# Altium PCB pyESP32.PcbDoc
Units mil, origin at the board's own origin, x right, y up, seen from the top; angles counter-clockwise.
Board outline 2140.63 x 1110 mil, 2 copper layers (Top Layer, Bottom Layer); 50 components, 49 nets, 214 pads, 57 vias.
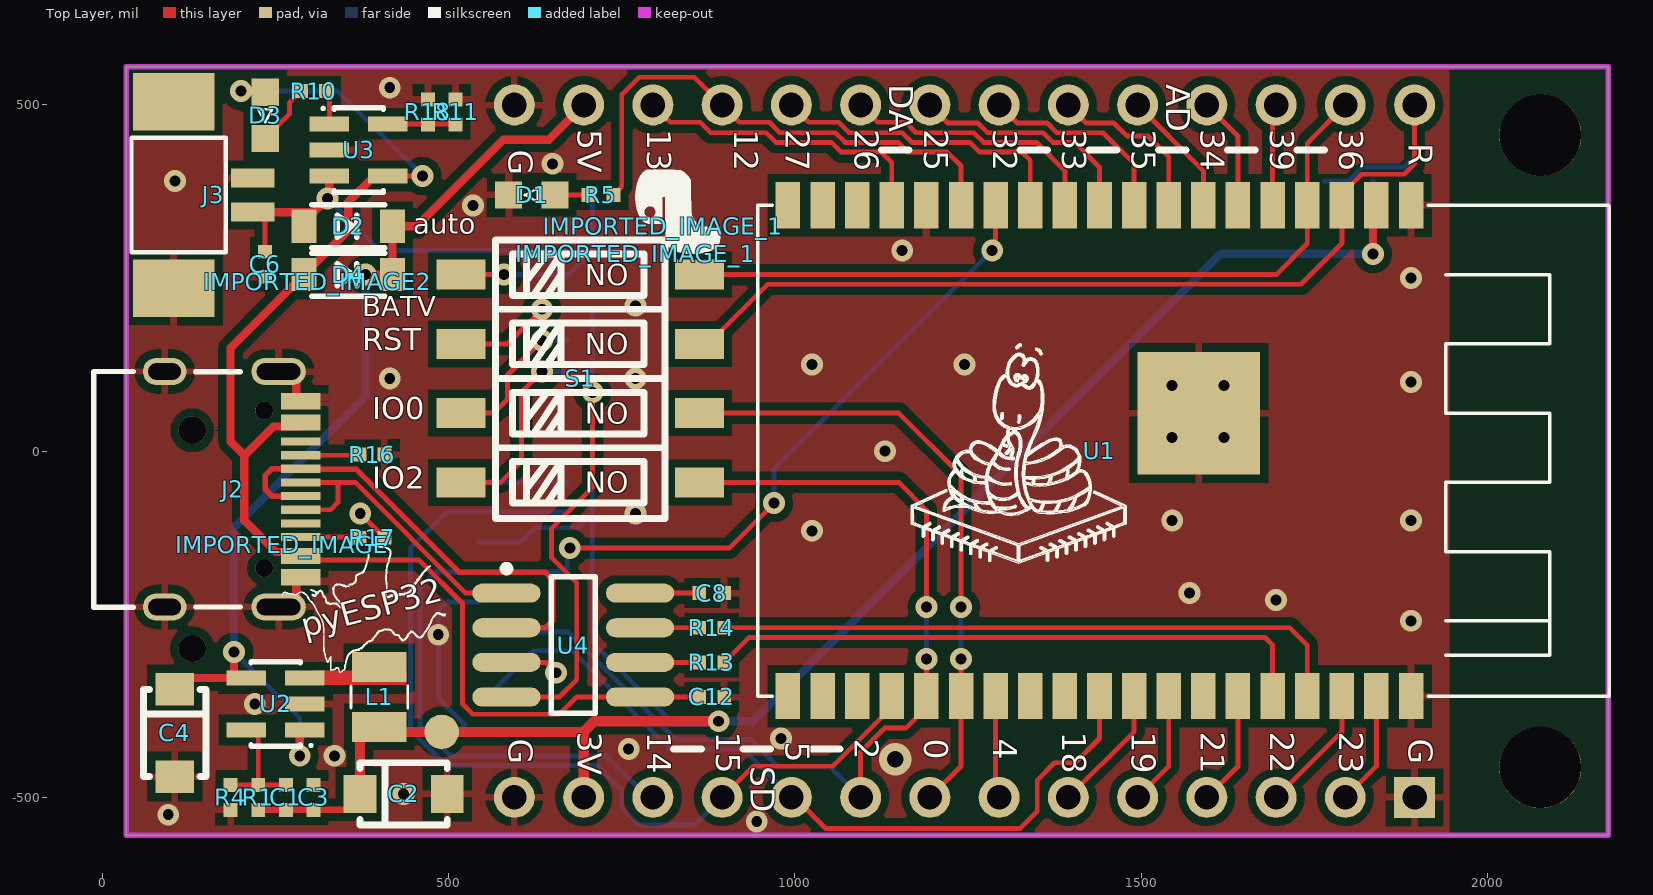
[diagram p0: Top Layer view]
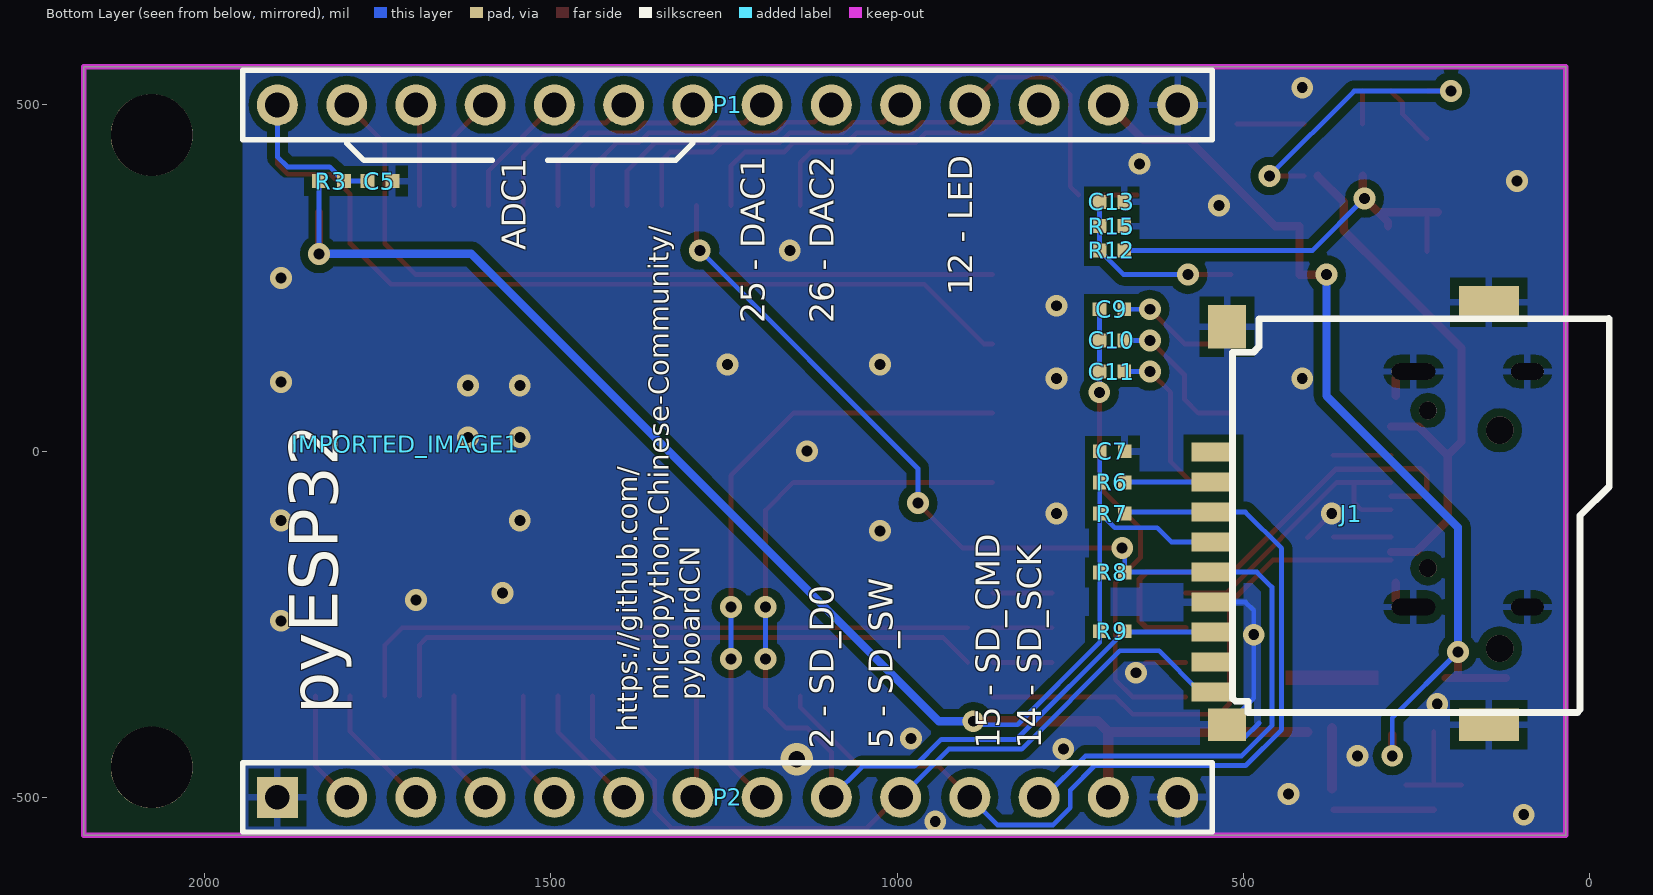
[diagram p1: Bottom Layer view, seen from below]

## Layer stack, top to bottom
Top Layer: signal copper 1.4
Dielectric: dielectric 12.6, FR-4, Dk 4.8
Bottom Layer: signal copper 1.4

## Board outline
34.37,-555 2175,-555 2175,555 34.37,555

## Design rules (kind name [scope] priority, off if disabled: settings)
Clearance Clearance_2 [(OnLayer('Keep-Out Layer'))] p1: gap=0
Clearance Clearance_1 [InPolygon] p2: gap=12
Clearance [All] p3: gap=7
ComponentClearance [All] p1 off: gap=10 collisioncheckmode=3 verticalgap=10 showdistances=FALSE
Height [All] p1 off: minheight=0 maxheight=1000 prefheight=500
PolygonConnect PolygonConnect_1 [IsVia] p1: connectstyle=Direct reliefconductorwidth=10 reliefentries=4 polygonreliefangle="90 Angle"
PolygonConnect [All] p2: connectstyle=Relief reliefconductorwidth=10 reliefentries=4 polygonreliefangle="90 Angle"
RoutingVias [All] p1: holewidth=28 width=50 viastyle="Through Hole" minholewidth=11.81 minwidth=23.62 maxholewidth=15.75 maxwidth=31.5
SilkscreenOverComponentPads [All] p1: minsilkscreentomaskgap=10
SolderMaskExpansion [All] p1: expansion=4
Width [All] p1: maxlimit=20 minlimit=7 preferedwidth=7
25 further rules are at their usual default settings.

## Classes and differential pairs
component class pyESP32: C1 C2 C3 C4 C5 C6 C7 C8 C9 C10 C11 C12 C13 D1 D2 D3 D4 J1 J2 J3 L1 P1 P2 R1 R3 R4 R5 R6 R7 R8 R9 R10 R11 R12 R13 R14 R15 R16 R17 R18 S1 U1 U2 U3 U4

## Components (designator, comment, footprint, x,y, rotation, side; value= is the part's Value field where it differs from the comment)
C1 "22p" C0402 265,-500 r270 top
C2 "47uF" 3216 435,-495 r0 top
C3 "100n" C0402 305,-500 r270 top
C4 "47uF" 3216 104.37,-407 r270 top
C5 "100n" C0402 1747,390 r0 bottom
C6 "2.2u" C0402 235,270 r90 top
C7 "2.2u" C0402 689.37,0 r0 bottom
C8 "100n" C0402 880,-205 r180 top
C9 "2.2u" C0402 690,205 r0 bottom
C10 "4.7u" C0402 690,160 r0 bottom
C11 "4.7u" C0402 690,115 r0 bottom
C12 "100n" C0402 880,-355 r0 top
C13 "100n" C0402 690,360 r0 bottom
D1 "LED GREEN" LED_0603_GREEN 620,370 r90 top
D2 "SS14" SOD-123 355,325 r180 top (schematic designator D4)
D3 "LED RED" LED_0603_RED 235,485 r180 top
D4 "SS14" SOD-123 355,255 r180 top
IMPORTED_IMAGE "Comment" IMPORTED_IMAGE 260,-135 r0 top
IMPORTED_IMAGE1 "Comment" IMPORTED_IMAGE 1710,10 r180 bottom (schematic designator IMPORTED_IMAGE)
IMPORTED_IMAGE2 "Comment" IMPORTED_IMAGE 311,245 r315 top (schematic designator IMPORTED_IMAGE)
IMPORTED_IMAGE_1 "Comment" IMPORTED_IMAGE 770,285 r90 top (schematic designator IMPORTED_IMAGE)
IMPORTED_IMAGE_1 "Comment" IMPORTED_IMAGE 810,325 r90 top (schematic designator IMPORTED_IMAGE)
J1 "microSD PUSH-PULL" microSD-1 344.37,-90 r180 bottom
J2 "Type C 16p" "Type-C 16P" 254.37,-55 r270 top
J3 "Bat" 2P-1.25 160,370 r90 top
L1 "2.2uH" IND-252012 400,-355 r90 top
P1 "Header 14" HDR1X14#1 1895,500 r180 bottom
P2 "Header 14" HDR1X14#2 1895,-500 r180 bottom
R1 "91K" SMD0402 225,-500 r270 top
R3 "10K" SMD0402 1817,390 r0 bottom
R4 "20K" SMD0402 185,-500 r90 top
R5 "2K" SMD0402 720,370 r0 top
R6 "10K" SMD0402 689.37,-45 r180 bottom
R7 "10K" SMD0402 689.37,-90 r180 bottom
R8 "10K" SMD0402 689.37,-175 r180 bottom
R9 "10K" SMD0402 689.37,-260 r180 bottom
R10 "2K" SMD0402 305,520 r180 top
R11 "10K" SMD0402 510,490 r270 top
R12 "330K" SMD0402 690,290 r180 bottom
R13 "470" SMD0402 880,-305 r0 top
R14 "470" SMD0402 880,-255 r0 top
R15 "91K" SMD0402 690,325 r0 bottom
R16 "5.1k" SMD0402 389.37,-5 r0 top
R17 "5.1k" SMD0402 389.37,-125 r0 top
R18 "NC" SMD0402 470,490 r270 top (schematic designator R14)
S1 "SW DIP-4" SW-SMD4 690,105 r270 top
U1 "ESP32-WROVER" ESP32-WROVER 940,355 r270 top
U2 "HX3406" SOT23-5 250,-365 r90 top
U3 "TP4054" SOT23-5 370,435 r270 top
U4 "CH330N" NSO8_M 680,-280 r0 top

## Footprints (in the part's own frame and the unit in brackets; to place one, negate y for a bottom-side part, rotate by r counter-clockwise, add the part's x,y. Pads: shape width x height; smd on the part's side, far side on the other; paste and mask are expansions set on the pad)
2P-1.25 [mm]
  rect 0.7x1.6 smd: 1(-0.625,-1.45) 2(0.625,-1.45)
  rect 2.1x3 smd: ""(-3.425,1.45) ""(3.425,1.45)
  silkscreen extent -2.1,-0.46 2.1,3, body extent -3.5,-2.22 3.5,3.37, height 3.9
3216 [mm]
  rect 1.2x1.4 smd: 1(-1.6,0) 2(1.6,0)
  silkscreen extent -1.6,-1.14 1.6,1.14, body extent -1.7,-0.9 1.7,0.9, height 1.8
C0402 [mil]
  rect 20x20 smd: 1(-18,0) 2(18,0)
  body extent -20,-10 20,10, height 14
ESP32-WROVER [mil] "ESP32-WROVER"
  rect 66.93x35.43 smd: 1(0,950) 2(0,900) 3(0,850) 4(0,800) 5(0,750) 6(0,700) 7(0,650) 8(0,600) 9(0,550) 10(0,500) 11(0,450) 12(0,400) 13(0,350) 14(0,300) 15(0,250) 16(0,200) 17(0,150) 18(0,100) 19(0,50) 20(708.66,50) 21(708.66,100) 22(708.66,150) 23(708.66,200) 24(708.66,250) 25(708.66,300) 26(708.66,350) 27(708.66,400) 28(708.66,450) 29(708.66,500) 30(708.66,550) 31(708.66,600) 32(708.66,650) 33(708.66,700) 34(708.66,750) 35(708.66,800) 36(708.66,850) 37(708.66,900) 38(708.66,950)
  rect 177.17x177.17 smd: 39(300,643.31)
  silkscreen extent 0,7 709,1236, body extent 0,5 710,1235, height 138
HDR1X14#1 [mm] "Connector; Header; 14 Position"
  round 1.5 hole 0.9: 1(0,0) 2(2.54,0) 3(5.08,0) 4(7.62,0) 5(10.16,0) 6(12.7,0) 7(15.24,0) 8(17.78,0) 9(20.32,0) 10(22.86,0) 11(25.4,0) 12(27.94,0) 13(30.48,0) 14(33.02,0)
  silkscreen extent -1.27,-1.27 34.29,1.27
HDR1X14#2 [mm] "Connector; Header; 14 Position"
  rect 1.5x1.5 hole 0.9: 1(0,0)
  round 1.5 hole 0.9: 2(2.54,0) 3(5.08,0) 4(7.62,0) 5(10.16,0) 6(12.7,0) 7(15.24,0) 8(17.78,0) 9(20.32,0) 10(22.86,0) 11(25.4,0) 12(27.94,0) 13(30.48,0) 14(33.02,0)
  silkscreen extent -1.27,-1.27 34.29,1.27
IMPORTED_IMAGE [mil]
  silkscreen extent 0,-185 236,0
IND-252012 [mm]
  rect 1.1x2 smd: 1(1.092,0) 2(-1.092,0)
  silkscreen extent -0.4,-1.04 0.4,1.04, body extent -1.3,-1 1.3,1, height 1.2
LED_0603_GREEN [mm]
  rect 1x1 smd paste+0 mask+0: 1(0,-0.85) 2(0,0.85)
  silkscreen extent -0.25,-0.23 0.25,0.25, body extent -0.38,-0.76 0.38,0.76, height 0.8
LED_0603_RED [mm]
  rect 1x1 smd paste+0 mask+0: 1(0,-0.85) 2(0,0.85)
  silkscreen extent -0.25,-0.23 0.25,0.25, body extent -0.38,-0.76 0.38,0.76, height 0.8
microSD-1 [mm]
  rect 1.6x0.7 smd: 1(-5.05,2.25) 2(-5.05,1.15) 3(-5.05,0.05) 4(-5.05,-1.05) 5(-5.05,-2.15) 6(-5.05,-3.25) 7(-5.05,-4.35) 8(-5.05,-5.45) 9(-5.05,-6.55)
  rect 1.4x1.2 smd: GP1(-4.55,-7.75)
  rect 2.2x1.2 smd: GP2(5.05,-7.75) GP3(5.05,7.75)
  rect 1.4x1.6 smd: GP4(-4.55,6.85)
  silkscreen extent -4.35,-7.29 9.47,7.15, body extent -5.85,-8 9.4,8, height 1.85
NSO8_M [mm]
  oval 2.5x0.7 smd: 1(-2.45,1.905) 2(-2.45,0.635) 3(-2.45,-0.635) 4(-2.45,-1.905) 5(2.45,-1.905) 6(2.45,-0.635) 7(2.45,0.635) 8(2.45,1.905)
  silkscreen extent -2.57,-2.5 0.8,2.93, body extent -2.87,-2.46 2.91,2.44, height 1.45
SMD0402 [mil]
  rect 20x20 smd: 1(-18,0) 2(18,0)
  body extent -20,-10 20,10, height 14
SOD-123 [mil]
  rect 35.8x48 smd: 1(64,0) 2(-64,0)
  silkscreen extent -53,-31 53,31, body extent -73,-32 73,31, height 50
SOT23-5 [mm] "SOT-23/SC-74A; 5 Leads; Body 3 x 3 mm, inc. leads (LxW max)"
  rect 0.55x1.45 smd: 1(-0.95,-1.075) 2(0,-1.075) 3(0.95,-1.075) 4(0.95,1.075) 5(-0.95,1.075)
  silkscreen extent -1.57,-1.35 1.55,0.9, body extent -1.5,-1.25 1.5,1.25, height 1.05
SW-SMD4 [mm]
  rect 1.1x1.8 smd: 1(-3.81,-4.375) 2(-1.27,-4.375) 3(1.27,-4.375) 4(3.81,-4.375) 5(3.81,4.375) 6(1.27,4.375) 7(-1.27,4.375) 8(-3.81,4.375)
  silkscreen extent -5.08,-3.1 5.13,3.11, body extent -5.81,-4.95 5.82,4.95, height 4.05
"Type-C 16P" [mm]
  rect 0.3x1.45 smd: A1(-3.375,0.82) A4(-2.6,0.82) A5(-1.25,0.82) A6(-0.25,0.82) A7(0.25,0.82) A8(1.25,0.82) A9(2.6,0.82) A12(3.375,0.82) B1(3.075,0.82) B4(2.3,0.82) B5(1.75,0.82) B6(0.75,0.82) B7(-0.75,0.82) B8(-1.75,0.82) B9(-2.3,0.82) B12(-3.075,0.82)
  oval 1x2 smd: E1(-4.32,0) E4(4.32,0)
  oval 0.6x1.6 hole 0.6 slot 1.6 at 90 deg: E1(-4.32,0) E4(4.32,0)
  oval 1x1.6 smd: E2(-4.32,-4.18) E3(4.32,-4.18)
  oval 0.6x1.2 hole 0.6 slot 1.2 at 90 deg: E2(-4.32,-4.18) E3(4.32,-4.18)
  round 0.65 hole 0.65 unplated: ""(-2.89,-0.53) ""(2.89,-0.53)
  silkscreen extent -4.32,-6.78 4.32,-1.4, body extent -4.48,-6.83 4.48,0.92, height 3.26

## Part data
C1 C3 C5 C6 C7 C8 C9 C10 C11 C12 C13: library part Cap
C2 C4: library part E
D1: library part LED-GREEN, "Green LED"
D2 D4: library part Diode
D3: library part LED-RED, "RED LED"
J3: library part "Header 2", "Header, 2-Pin"
L1: library part Inductor
P1 P2: "Header, 14-Pin"
R1 R3 R4 R5 R6 R7 R8 R9 R10 R11 R12 R13 R14 R15 R16 R17 R18: library part Res
S1: "DIP Switch, 4 Position, SPST"
U2: library part SY8089

## Free pads (board coordinates)
  round 50 on Top Solder: 0(380,-200)
  round 50 smd: 0(490,-405.5)
  round 39.37 on Top Solder: 0(935,155) 0(1845,450)
  round 39.37 on Bottom Solder: 0(1145,-535) 0(1200,-435)
  round 118.11 hole 118.11 unplated: ""(2076.57,-456.57) ""(2076.57,456.57)

## Via types
v1: diameter 31.5, hole 15.75, Top Layer to Bottom Layer, 54 vias
v2: diameter 39.37, hole 39.37, Top Layer to Bottom Layer, 2 vias
v3: diameter 47.24, hole 23.62, Top Layer to Bottom Layer, 1 vias

## Nets (pads, with @x,y where several pads share a name; then routed paths per layer and width w, separated by ;. In a path a pad name is that pad's centre, name@x,y a point inside that pad or via, vN(x,y) a via of type N, cw(c..) or ccw(c..) an arc to the next point about the centre after c; other vN are vias at no path point)
3V3: C1.2 C2.1 C3.2 C7.2 J1.4 L1.2 P2.13 pad.0@490,-405.5 R1.2 R3.2 R6.1 R7.1 R8.1 R9.1 U1.2 | length 2894.4
  Top Layer w9: R1.2 C2.1@370,-518
  Top Layer w12: v1(1835,285) U1.2@1835,345
  Top Layer w15: C2.1@372,-487 L1.2@372,-400 ; L1.2@407.5,-405.5 695,-405.5 ; P2.13@695,-495 695,-405.5 ; v1@890,-385 v1(890,-390) 710.5,-390 695,-405.5
  Bottom Layer w7: J1.4 603.66,-131.34 624.5,-110.5 685.72,-110.5 706.22,-90 R7.1 ; C7.2 R7.1 ; v1@890,-395 826.17,-395 707.37,-276.2 R9.1 R7.1 ; v1(1835,285) R3.2
  Bottom Layer w12: v1(890,-390) 940,-390 1615,285 v1(1835,285)
5V: C4.1 D2.2 D4.2 P1.13 U2.1 U2.4 | length 1425.3
  Top Layer w12: C4.1@120.78,-327.6 U2.4@190,-327.6 ; v1(190,-290) U2.4@190,-327.6 ; U2.4 U2.4@190,-327.6 ; v1(285,-440) U2.1@285,-409.72 ; v1(380,255) D4.2 D2.2 454,325 579,450 645,450 P1.13
  Bottom Layer w7: v1(190,-290) 285,-385 v1(285,-440)
  Bottom Layer w12: v1(190,-290) 190,-110 380,80 v1(380,255)
BAT: C6.2 D2.1 J3.1 R12.2 U3.3 | length 603.5
  Top Layer w7: C6.2 J3.1@235,340
  Top Layer w12: J3.1@219.37,345 D2.1@305,345 ; D2.1 291,331 D2.1@305,345 ; U3.3 327.68,367.68 v1(325,365) D2.1@305,345
  Bottom Layer w7: v1(325,365) 400,290 R12.2
DM: J2.A7 J2.B7 U4.2 | length 691.4
  Top Layer w8: J2.A7 244.84,-64.84 235,-55 235,-35 244.53,-25.47 J2.B7 287.18,-26 366.51,-26 515.51,-175 640,-175 650,-185 650,-245 640,-255 U4.2
DP: J2.A6 J2.B6 U4.1 | length 449.7
  Top Layer w7: J2.B6 329.53,-84.53 340,-74.06 340,-45.16 ; J2.A6 340,-45.16 ; U4.1 525,-205 365.16,-45.16 340,-45.16
FB: C1.1 R1.1 R4.2 U2.5 | length 157
  Top Layer w7: R4.2 R1.1 ; U2.5@225,-405 R1.1 ; C1.1 R1.1
GND: C2.2 C3.1 C4.2 C5.1 C6.1 C7.1 C8.1 C12.2 C13.1 D1.2 J1.6 J1.GP1 J1.GP2 J1.GP3 J1.GP4 J2.A1 J2.A12 J2.B1 J2.B12 J2.E1 J2.E2 J2.E3 J2.E4 J3.2 J3.@102.91,235.16 P1.14 P2.1 P2.14 R4.1 R11.1 R15.1 R16.2 R17.2 R18.1 U1.1 U1.15 U1.38 U1.39 U2.2 U3.2 U4.3 | length 484.1
  Top Layer w7: v1(372.37,-90) R17.2 ; U4.3 640,-305 v1(655,-320)
  Top Layer w12: J2.E4@280,-215 J2.A12@280,-190 ; J2.A1@280,80 J2.E1@280,105
  Bottom Layer w7: 477.41,-392.71 498.63,-413.92 504.7,-413.92 J1.GP1 485,-356.61 485,-230 497.05,-217.95 J1.6
  other v1: 945,-535 95,-525 435,-495 335,-440 760,-430 980,-415 220,-365 485,-265 1890,-245 1695,-215 1570,-205 1025,-115 1545,-100 1890,-100 770,-90 1130,0 1545,20 1620,20 1545,95 1620,95 1890,100 415,105 770,105 1025,125 1245,125 770,210 1890,250 1155,290 535,355 105,390 650,415 415,525
  other v3: 1145,-445
IO0: P2.8 S1.6 U1.25 | length 898.7
  Top Layer w7: S1.6 1150,55 1240,-35 v1(1240,-225) ; P2.8 1240,-455 U1.25 v1(1240,-300)
  Bottom Layer w7: v1(1240,-300) v1(1240,-225)
IO2: J1.7 P2.9 R9.2 S1.5 U1.24 | length 1466.5
  Top Layer w7: S1.5 1150,-45 1190,-85 v1(1190,-225) ; P2.9 1095,-434.49 1129.49,-400 1160,-400 1190,-370 U1.24 v1(1190,-300)
  Bottom Layer w7: J1.7 R9.2@670.11,-261.26 ; R9.2 827.62,-416.25 936.25,-416.25 975,-455 978.39,-455 ; 978.42,-454.97 1049.97,-454.97 P2.9 ; v1(1190,-300) v1(1190,-225)
IO4: P2.7 U1.26 | length 148.4
  Top Layer w7: U1.26 1290,-495 P2.7
IO5: J1.9 P2.10 U1.29 | length 1152.5
  Top Layer w7: P2.10@995,-495 1045,-545 1325,-545 1350,-520 1350,-475 1375,-450 1405,-450 1440,-415 U1.29
  Bottom Layer w7: J1.9@562.13,-347.87 621.71,-288.29 678.29,-288.29 820.25,-430.25 925.25,-430.25 P2.10
IO12: P1.11 R5.2 U1.14 | length 760.4
  Top Layer w7: R5.2 750,382 750,515 775.03,540.03 854.97,540.03 P1.11 920,475 963.39,475 978.42,459.97 1058.62,459.97 1072.62,445.97 1149.43,445.97 1163.43,431.97 1220,431.97 1240,411.97 U1.14
IO13: P1.12 U1.16 | length 441.4
  Top Layer w7: P1.12 820,475 863.39,475 878.42,459.97 958.62,459.97 972.62,445.97 1052.82,445.97 1066.82,431.97 1125,431.97 1140,416.97 U1.16
IO14: J1.5 P2.12 R8.2 U1.13 | length 1704.3
  Top Layer w7: v1(675,-140) 905,-140 v1(970,-75) ; v1@1290,295 U1.13
  Bottom Layer w7: R8.2@671.02,-174.65 J1.5 480.35,-174.65 458.75,-196.25 458.75,-396.4 502.36,-440 727.88,-440 787.88,-500 P2.12 ; R8.2 v1@671.37,-148.63 ; v1(970,-75) 970,-25 v1(1285,290)
IO15: J1.3 P2.11 R7.2 U1.23 | length 1362.1
  Top Layer w7: P2.11 940.03,-454.97 1054.72,-454.97 1140,-369.69 U1.23
  Bottom Layer w7: R7.2@669.4,-88.03 J1.3 496.97,-88.03 444.75,-140.25 444.75,-402.19 496.56,-454 714.54,-454 750,-489.46 750,-515 775.03,-540.03 844.97,-540.03 ; 845,-540 855,-540 P2.11
IO18: P2.6 U1.30 | length 185.7
  Top Layer w7: P2.6 1490,-405 U1.30
IO19: P2.5 U1.31 | length 165
  Top Layer w7: P2.5 1540,-455 U1.31
IO21: P2.4 U1.33 | length 165
  Top Layer w7: P2.4 1640,-455 U1.33
IO22: P2.3 U1.36 | length 185.7
  Top Layer w7: P2.3 1790,-405 U1.36
IO23: P2.2 U1.37 | length 165
  Top Layer w7: P2.2 1840,-455 U1.37
IO25: P1.8 U1.10 | length 337.3
  Top Layer w7: P1.8 1221.03,473.97 1264.42,473.97 1278.42,459.97 1358.62,459.97 1372.62,445.97 1404.03,445.97 1440,410 U1.10
IO26: P1.9 U1.11 | length 384.4
  Top Layer w7: P1.9 1120,475 1160,475 1175.03,459.97 1258.62,459.97 1272.62,445.97 1349.03,445.97 1390,405 U1.11
IO27: P1.10 U1.12 | length 443.1
  Top Layer w7: P1.10 1020,475 1063.39,475 1078.42,459.97 1155.23,459.97 1169.23,445.97 1252.82,445.97 1266.82,431.97 1328.03,431.97 1340,420 U1.12
IO32: P1.7 U1.9 | length 290.2
  Top Layer w7: P1.7 1321.03,473.97 1364.42,473.97 1378.42,459.97 1445.03,459.97 1490,415 U1.9
IO33: P1.6 U1.8 | length 246.1
  Top Layer w7: P1.6 1421.03,473.97 1460.83,473.97 1479.8,455 1510,455 1540,425 U1.8
IO34: P1.4 U1.6 | length 163.6
  Top Layer w7: P1.4 1640,455 U1.6
IO35: P1.5 U1.7 | length 184.4
  Top Layer w7: P1.5 1590,405 U1.7
IO36: P1.2 S1.8 U1.4 | length 1119.2
  Top Layer w7: S1.8 1695,255 1740,300 U1.4 1740,445 P1.2
IO39: P1.3 U1.5 | length 140
  Top Layer w7: U1.5 P1.3@1690,495
NetC8_2: C8.2 U4.8 | length 85.5
  Top Layer w7: U4.8 C8.2
NetC9_1: C9.1 S1.2 | length 175
  Top Layer w7: S1.2 585,155 v1(635,205)
  Bottom Layer w7: v1(635,205) C9.1
NetC10_1: C10.1 S1.3 | length 218.2
  Top Layer w7: S1.3 565,55 585,75 585,110 v1(635,160)
  Bottom Layer w7: v1(635,160) C10.1
NetC11_1: C11.1 S1.4 | length 279.1
  Top Layer w7: S1.4 575,-45 605,-15 605,85 v1(635,115)
  Bottom Layer w7: v1(635,115) C11.1
NetC13_2: C13.2 R12.1 R15.2 S1.1 | length 274.7
  Top Layer w7: S1.1 v1(580,255)
  Bottom Layer w7: v1(580,255) 673,255 R12.1 C13.2
NetD1_1: D1.1 R5.1 | length 48.5
  Top Layer w7: D1.1 R5.1
NetD3_2: D3.2 R10.2 | length 90
  Top Layer w7: D3.2 270,486.53 270,503 R10.2
NetJ2_A5: J2.A5 R16.1 | length 83.9
  Top Layer w7: J2.A5 R16.1@370.58,-5.79
NetJ2_B5: J2.B5 R17.1 | length 83.6
  Top Layer w7: J2.B5 R17.1@370.27,-123.9
NetL1_1: L1.1 U2.3
NetR10_1: R10.1 U3.1 | length 47.9
  Top Layer w7: U3.1 R10.1@327.68,520.32
NetR11_2: R11.2 R18.2 U3.5 | length 97.3
  Top Layer w7: U3.5 R11.2@509.6,472.4
NetR13_1: R13.1 U4.6 | length 85.5
  Top Layer w7: U4.6 R13.1
NetR14_1: R14.1 U4.7 | length 85.5
  Top Layer w7: U4.7 R14.1
RST: C5.2 P1.1 R3.1 S1.7 U1.3 | length 1486.6
  Top Layer w7: S1.7 875,155 961,241 1731,241 1790,300 U1.3 1790,371.03 1818.97,400 1880,400 1895,415 P1.1
  Bottom Layer w7: C5.2 R3.1 1819.5,410.5 1880.5,410.5 1895,425 P1.1
SD_DAT3: J1.2 R6.2 | length 127.9
  Bottom Layer w7: J1.2 R6.2@671.09,-44.72
U_RTS: C9.2 C10.2 C11.2 U4.4 | length 686.4
  Top Layer w7: U4.4 660,-355 685,-330 685,-190 648.75,-153.75 648.75,-111.25 708,-52 v1(708,85)
  Bottom Layer w7: v1(708,85) C9.2
U_RX: R14.2 U1.35 | length 926
  Top Layer w7: R14.2 1715,-255 1740,-280 U1.35
U_TX: R13.2 U1.34 | length 885.1
  Top Layer w7: R13.2 934,-269 1679,-269 1690,-280 U1.34
VBUS: C12.1 D3.1 D4.1 J2.A4 J2.A9 J2.B4 J2.B9 U3.4 U4.5 | length 1950.8
  Top Layer w7: v1(200,520) D3.1@233.46,520 ; J2.A9 457.36,-157.36 520,-220 520,-365 535,-380 660,-380 685,-355 U4.5 C12.1 ; U3.4 v1(462.4,397.6)
  Top Layer w12: J2.B4 250.55,-145.55 205,-100 205,-6.2 ; J2.B9 246.76,35.55 205,-6.2 ; U3.4@392.6,397.6 355,360 355,319 D4.1 185,149 185,13.8 205,-6.2
  Bottom Layer w7: v1(200,520) 340,520 v1(462.4,397.6)
pads on no net: J1.1 J1.8 J2. J2.A8 J2.B8 J3.@102.91,504.84 U1.17 U1.18 U1.19 U1.20 U1.21 U1.22 U1.27 U1.28 U1.32
copper on no net:
  other v2: 129.8,-284.88 129.8,30.08

## Polygon pours and split planes (outlines as drawn)
GND on Bottom Layer "Top Layer-No Net" (solid, remove dead copper, pour order 6): 1945,-555 1945,555 34.37,555 34.37,-555
GND on Top Layer "Top Layer-No Net" (solid, remove dead copper, pour order 8): 34.37,555 34.37,-555 1945,-555 1945,555

## Keep-outs
Keep-Out Layer:
  the board outline again, w7.87

## Other copper
Top Layer:
  rectangle net NetL1_1: 305,-338 439,-317
  pour cut-out: 1945,555 2175,555 2175,-555 1945,-555

## Silkscreen, mask and mechanical layers (free items; w line width, h text height)
Top Overlay:
  drawing of 617 lines, arcs and shapes, not listed
  text "DA" at 1125,530 h60 r270
  text "AD" at 1525,530 h60 r270
  text "5V" at 675,465 h60 r270
  text "13" at 775,465 h60 r270
  text "12" at 901,465 h60 r270
  text "27" at 975,465 h60 r270
  text "26" at 1075,465 h60 r270
  text "25" at 1175,465 h60 r270
  text "32" at 1275,465 h60 r270
  text "33" at 1375,465 h60 r270
  text "35" at 1475,465 h60 r270
  text "34" at 1575,465 h60 r270
  text "39" at 1675,465 h60 r270
  text "36" at 1775,465 h60 r270
  text "R" at 1875,445 h60 r270
  text "G" at 575,435 h60 r270
  text "auto" at 448.9,303.99 h50
  text "BATV" at 375,185 h50
  text "RST" at 375,135 h55
  text "IO0" at 390,35 h55
  text "IO2" at 390,-65 h55
  text "pyESP32" at 295,-280 h60 r15
  text "3V" at 675,-405 h60 r270
  text "14" at 775,-405 h60 r270
  text "15" at 875,-405 h60 r270
  text "18" at 1375,-405 h60 r270
  text "19" at 1475,-405 h60 r270
  text "21" at 1575,-405 h60 r270
  text "22" at 1675,-405 h60 r270
  text "23" at 1775,-405 h60 r270
  text "G" at 575,-415 h60 r270
  text "2" at 1075,-415 h60 r270
  text "0" at 1175,-415 h60 r270
  text "4" at 1275,-415 h60 r270
  text "G" at 1875,-415 h60 r270
  text "5" at 975,-420 h60 r270
  text "SD" at 925,-455 h60 r270
Bottom Overlay:
  lines w7.87: 1295,445 1320,420 1505,420 ; 1585,420 1770,420 1795,445
  text "ADC1" at 1525,290 h60 r270
  text "12 - LED" at 880,225 h60 r270
  text "26 - DAC2" at 1080,185 h60 r270
  text "25 - DAC1" at 1180,185 h60 r270
  text "pyboardCN" at 1275,-360 h50 r270
  text "micropython-Chinese-Community/" at 1320,-360 h50 r270
  text "pyESP32" at 1785,-380 h120 r270
  text "https://github.com/" at 1365,-405 h50 r270
  text "14 - SD_SCK" at 780,-430 h60 r270
  text "15 - SD_CMD" at 840,-430 h60 r270
  text "5 - SD_SW" at 995,-430 h60 r270
  text "2 - SD_D0" at 1080,-430 h60 r270
Top Solder:
  rectangle: 912,-27 950,37

## Dimensions
34.37,-555 to 34.37,555 on Mechanical 1
2175,-555 to 34.37,-555 on Mechanical 1

## Text inside footprints (layer, text, board x,y; h text height)
S1: Top Overlay "ON" at 760.12,270.32 h30 r180; Top Overlay "ON" at 760.12,70.32 h30 r180; Top Overlay "ON" at 760.12,-29.68 h30 r180; Top Overlay "ON" at 760.12,170.32 h30 r180